# Altium PCB A_D.000000.001.PcbDoc
Units mm, origin at the board's own origin, x right, y up, seen from the top; angles counter-clockwise.
Board outline 23 x 12 mm, 2 copper layers (Top Layer, Bottom Layer), stack 1.48 mm thick; 11 components, 12 nets, 36 pads, 0 vias.
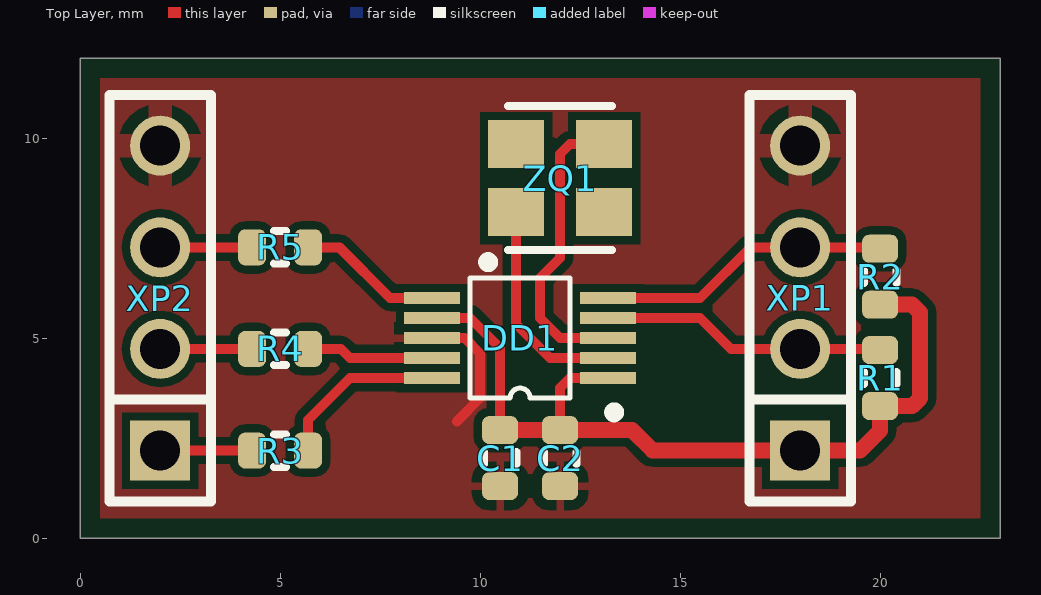
[diagram p0: Top Layer view]
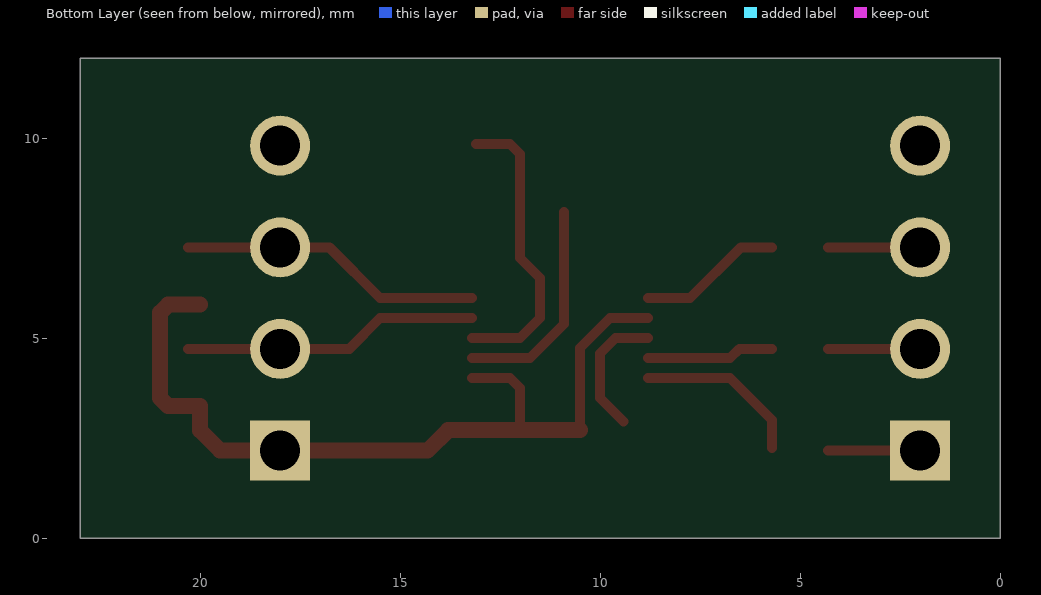
[diagram p1: Bottom Layer view, seen from below]
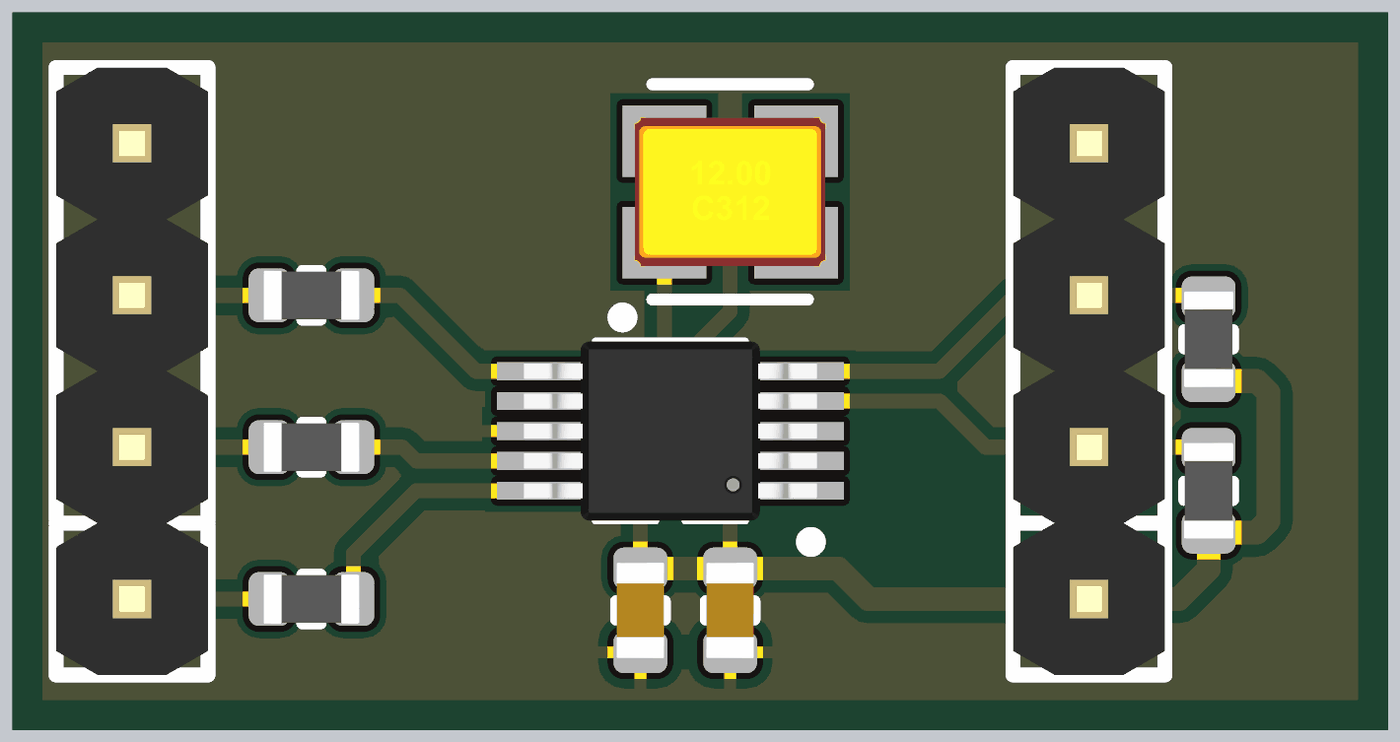
[diagram p2: 3D render of the assembled board from above, using the file's embedded part models]

## Layer stack, top to bottom
Top Solder: solder mask 0.01, Solder Resist, Dk 3.5
Top Layer: signal copper 0.03
Dielectric1: core 1.42, FR-4, Dk 4.2
Bottom Layer: signal copper 0.03
Bottom Solder: solder mask 0.01, Solder Resist, Dk 3.5

## Board outline
0,0 23,0 23,12 0,12

## Design rules (kind name [scope] priority, off if disabled: settings)
Clearance [All] p1: gap=0.2 ignorepadtopadclearanceinfootprint=FALSE
ComponentClearance [All] p1 off: gap=0.25 collisioncheckmode=3 verticalgap=0.25 showdistances=FALSE
DiffPairsRouting [All] p1: maxlimit=0.4 minlimit=0.15 mostfreqgap=0.25 toplayer_minwidth=0.2 toplayer_maxwidth=0.4 toplayer_prefwidth=0.25 bottomlayer_minwidth=0.2 bottomlayer_maxwidth=0.4 bottomlayer_prefwidth=0.25 maxuncoupledlength=12
Height [All] p1: minheight=0 maxheight=25 prefheight=25
HoleSize [All] p1: absolutevalues=TRUE maxlimit=6 minlimit=0.3 maxpercent=80.000 minpercent=20.000
HoleToHoleClearance [All] p1: gap=0.25 allowstackedmicrovias=TRUE
MinimumSolderMaskSliver [All] p1 off: minsoldermaskwidth=0.254
PlaneClearance [All] p1: clearance=0.5
PlaneConnect [All] p1: planeconnectstyle=Relief reliefexpansion=0.5 reliefentries=4 reliefconductorwidth=0.25 reliefairgap=0.25
PolygonConnect PolygonConnect_XW1 [InComponent('XW1') vs IsPolygon] p1: connectstyle=Direct reliefconductorwidth=0.254 reliefentries=4 polygonreliefangle="90 Angle" airgapwidth=0.254
PolygonConnect PolygonConnect_Components [InComponent('C*') OR InComponent('R*') OR InComponent('NR*') OR InComponent('DA*') OR InComponent('DD*') OR InComponent('HL*')] p2: connectstyle=Relief reliefconductorwidth=0.2 reliefentries=4 polygonreliefangle="90 Angle" airgapwidth=0.25
PolygonConnect PolygonConnect_Connectors [All vs (InPadClass('All Pads'))] p3: connectstyle=Relief reliefconductorwidth=0.6 reliefentries=4 polygonreliefangle="90 Angle" airgapwidth=0.3
PolygonConnect PolygonConnect_Via [All] p4: connectstyle=Direct reliefconductorwidth=0.254 reliefentries=4 polygonreliefangle="90 Angle" airgapwidth=0.254
RoutingCorners [All] p1: cornerstyle=45-Degree minsetback=1.5 maxsetback=3.5
RoutingVias [All] p1: holewidth=0.6 width=1.2 viastyle="Through Hole" minholewidth=0.3 minwidth=0.6 maxholewidth=1 maxwidth=2
SMDEntry [All] p1: side=TRUE corner=TRUE anyangle=TRUE
SilkToSilkClearance [All] p1 off: silktosilkclearance=0.254
SilkToSolderMaskClearance [IsPad] p1 off: minsilkscreentomaskgap=0.254 clearancetoexposedcopper=TRUE
SolderMaskExpansion [All] p1: expansion=0.1
Width [All] p1: maxlimit=8 minlimit=0.2 preferedwidth=0.6
Width Width_TrackEnds [All] p2 off: maxlimit=0.25 minlimit=0.25 preferedwidth=0.25 checkconnectedcopper=TRUE
19 further rules are at their usual default settings.

## Components (designator, comment, footprint, x,y, rotation, side; value= is the part's Value field where it differs from the comment)
C1 "Capacitor" C0603_L 10.5,2 r90 top value=2.2uF
C2 "Capacitor" C0603_L 12,2 r90 top value=0.1uF
DD1 "Si5351x-x-GT" MSOP-10 11,5 r90 top value=Si5351A-B-GT
R1 "Resistor" R0603_L 20,4 r270 top value=4.7k
R2 "Resistor" R0603_L 20,6.535 r270 top value=4.7k
R3 "Resistor" R0603_L 5,2.19 r180 top value=0
R4 "Resistor" R0603_L 5,4.73 r180 top value=0
R5 "Resistor" R0603_L 5,7.27 r180 top value=0
XP1 "Text" PLS-4 18,6 r90 top value=PLS-4
XP2 "Text" PLS-4 2,6 r90 top value=PLS-4
ZQ1 "Crystal-1_3p" "SMD 3.2x2.5mm" 12,9 r0 top value=12.88667_KX-7-25.0MHz

## Footprints (in the part's own frame and the unit in brackets; to place one, negate y for a bottom-side part, rotate by r counter-clockwise, add the part's x,y. Pads: shape width x height; smd on the part's side, far side on the other; paste and mask are expansions set on the pad)
C0603_L [mm] "Chip Capacitor; Body 1.6 x 0.8 mm (LxW typ)"
  rrect50% 0.7x0.9 smd: 1(-0.7,0) 2(0.7,0)
  silkscreen extent -0.15,-0.41 0.15,0.41, body extent -0.8,-0.4 0.8,0.4, height 0.91
MSOP-10 [mm]
  rect 0.3x1.4 smd: 1(-1,-2.2) 2(-0.5,-2.2) 3(0,-2.2) 4(0.5,-2.2) 5(1,-2.2) 6(1,2.2) 7(0.5,2.2) 8(0,2.2) 9(-0.5,2.2) 10(-1,2.2)
  silkscreen extent -1.98,-2.48 1.5,1.25, body extent -1.5,-2.45 1.5,2.45, height 1.15
PLS-4 [mm]
  rect 1.5x1.5 hole 1: 1(-3.81,0)
  round 1.5 hole 1: 2(-1.27,0) 3(1.27,0) 4(3.81,0)
  silkscreen extent -5.08,-1.27 5.08,1.27, body extent -5.08,-1.27 5.08,1.27, height 8.9
R0603_L [mm] "Chip Resistor; Body 1.6 x 0.8 mm (LxW typ)"
  rrect50% 0.7x0.9 smd: 1(-0.7,0) 2(0.7,0)
  silkscreen extent -0.15,-0.41 0.15,0.41, body extent -0.8,-0.41 0.8,0.41, height 0.46
"SMD 3.2x2.5mm" [mm]
  rect 1.4x1.2 smd paste+0: 1(-1.1,-0.85) 2(1.1,-0.85) 3(1.1,0.85) 4(-1.1,0.85)
  silkscreen extent -1.92,-2.22 1.3,1.8, body extent -1.6,-1.25 1.6,1.25, height 0.77

## Part data
C1: library part GRM188R61C225KE15D, Dielectric Type=X5R, Manufacturer=Murata, Tolerance=±10%, Voltage=16V, Working Temperature Max=+85°С, Working Temperature Min=-55°С, Application Category=1, ID=152, Part Number=GRM188R61C225KE15D, Published=18.05.2010, Publisher="Andrew Danich", Type=Конденсатор
C2: library part GRM188R71E104KA01D, Dielectric Type=X7R, Manufacturer=Murata, Tolerance=±10%, Voltage=25V, Working Temperature Max=+125°С, Working Temperature Min=-55°С, Application Category=1, ID=228, Part Number=GRM188R71E104KA01D, Published=18.05.2010, Publisher="Andrew Danich", Type=Конденсатор
DD1: library part Si5351A-B-GT, Manufacturer="Silicon Labs", Supply Current=35mA, Working Temperature Max=+85°С, Working Temperature Min=-40°С, Application Category=1, Bandwidth=200MHz, Functional Analog=Si5351A-B-GTR, ID=3, Output Impedance=50ohm, Part Number=Si5351A-B-GT, Propagation Delay=-, Published=10.06.2018, Publisher="Andrew Danich", Rise\Fall Time=1.5ns\1.5ns, Series Type="I2C Prog CMOS Clock Generator", Supply Operation=+3.0…3.6V, Type=Микросхема
R1 R2: library part RC0603JR-074K7L, Limit Voltage=50V, Manufacturer=Yageo, Temperature Coefficient=100ppm, Tolerance=±5%, Total Power Dissipation=0.1W, Working Temperature Max=+155°С, Working Temperature Min=-55°С, Application Category=1, ID=56, Part Number=RC0603JR-074K7L, Published=24.03.2010, Publisher="Andrew Danich", Series Type=Thick-Film, Type=Резистор
R3 R4 R5: library part RC0603JR-070R, Limit Voltage=50V, Manufacturer=Yageo, Temperature Coefficient=100ppm, Tolerance=±5%, Total Power Dissipation=0.1W, Working Temperature Max=+155°С, Working Temperature Min=-55°С, Application Category=1, Functional Analog="RC0603FR-070RL, CR0603-J/-000E", ID=5, Part Number=RC0603JR-070R, Published=24.03.2010, Publisher="Andrew Danich", Series Type=Thick-Film, Type=Резистор
XP1 XP2: library part PLS-4, Limit Current=3A, Limit Voltage=250V, Resistance=15momh, Connector Type=Male, ID=3, Part Number=PLS-4, Pins=4, Pitch=2.54mm, Published=07.03.2013, Publisher="Andrew Danich", Surface Finish=Gold, Type=Вилка
ZQ1: library part 12.88667_KX-7-25.0MHz, Load Capacitance=10pF, Manufacturer="GEYER ELECTRONIC", Output Frequency=25МГц, Temperature Coefficient=±50ppm, Working Temperature Max=+70°С, Working Temperature Min=-20°С, Application Category=1, Functional Analog=-, ID=22, Part Number=12.88667_KX-7-25.0MHz, Published=12.09.2014, Publisher="Andrew Danich", Type=Резонатор

## Nets (pads, with @x,y where several pads share a name; then routed paths per layer and width w, separated by ;. In a path a pad name is that pad's centre, name@x,y a point inside that pad or via, vN(x,y) a via of type N, cw(c..) or ccw(c..) an arc to the next point about the centre after c; other vN are vias at no path point)
CLK0: DD1.10 R3.1 | length 4.2
  Top Layer w0.25: R3.1@5.7,2.25 5.7,2.95 6.75,4 DD1.10
CLK1: DD1.9 R4.1 | length 3.2
  Top Layer w0.25: R4.1 6.52,4.73 6.75,4.5 DD1.9
CLK2: DD1.6 R5.1 | length 3.6
  Top Layer w0.25: R5.1 6.48,7.27 7.75,6 DD1.6
CLKO_0: R3.2 XP2.1 | length 2.3
  Top Layer w0.25: XP2.1 R3.2
CLKO_1: R4.2 XP2.2 | length 2.3
  Top Layer w0.25: XP2.2 R4.2
CLKO_2: R5.2 XP2.3 | length 2.3
  Top Layer w0.25: XP2.3 R5.2
GND: C1.1 C2.1 DD1.8 XP1.4 XP2.4 | length 3.3
  Top Layer w0.25: DD1.8 9.614,5 10,4.614 10,3.5 9.416,2.916
I2C_SCL: DD1.4 R1.1 XP1.2 | length 7.4
  Top Layer w0.25: DD1.4 15.5,5.5 16.27,4.73 R1.1@20.3,4.73
I2C_SDA: DD1.5 R2.1 XP1.3 | length 7.6
  Top Layer w0.25: DD1.5 15.5,6 16.77,7.27 XP1.3 R2.1@20.3,7.27
NetDD1_2: DD1.2 ZQ1.1 | length 5.5
  Top Layer w0.25: ZQ1.1 10.9,5.35 11.75,4.5 DD1.2
NetDD1_3: DD1.3 ZQ1.3 | length 7.4
  Top Layer w0.25: ZQ1.3 12.25,9.85 12,9.6 12,7 11.5,6.5 11.5,5.5 12,5 DD1.3
VCC3P3: C1.2 C2.2 DD1.1 DD1.7 R1.2 R2.2 XP1.1 | length 21.2
  Top Layer w0.25: DD1.7 9.75,5.5 10.5,4.75 C1.2 ; C2.2 12,3.75 12.25,4 DD1.1
  Top Layer w0.4: C1.2 C2.2 13.8,2.7 14.31,2.19 XP1.1 19.5,2.19 20,2.69 R1.2 20.8,3.3 21,3.5 21,5.635 20.8,5.835 R2.2
pads on no net: ZQ1.2 ZQ1.4

## Polygon pours and split planes (outlines as drawn)
GND on Top Layer "GND_L01_P006" (solid, remove dead copper, pour order 6): 22.5,11.5 0.5,11.5 0.5,0.5 22.5,0.5

## Silkscreen, mask and mechanical layers (free items; w line width, h text height)
1 - Board Outline:
  the board outline again, w0.1
11 - Dementions (Top):
  lines w0.254: -2.508,1.524 -2,0 ; -2.508,10.476 -2,12 ; -2.254,0 -1.746,0 ; -2.254,12 -1.746,12 ; -2,1.023 -2,0 ; -2,10.977 -2,12 ; -1.492,1.524 -2,0 ; -1.492,10.476 -2,12 ; 0,-2.254 0,-1.746 ; 1.524,-2.508 0,-2 ; 1.524,-1.492 0,-2 ; 6.396,-2 0,-2 ; 16.604,-2 23,-2 ; 21.476,-2.508 23,-2 ; 21.476,-1.492 23,-2 ; 23,-2.254 23,-1.746
  text "12 (mm)" at -1.086,1.277 h1.52 r90
  text "23 (mm)" at 6.65,-2.914 h1.52